# Altium PCB Main_Circuit.PcbDoc
Units mil, origin at the board's own origin, x right, y up, seen from the top; angles counter-clockwise.
Board outline 3000 x 5880 mil, 2 copper layers (Top Layer, Bottom Layer); 17 components, 32 nets, 97 pads, 2 vias.
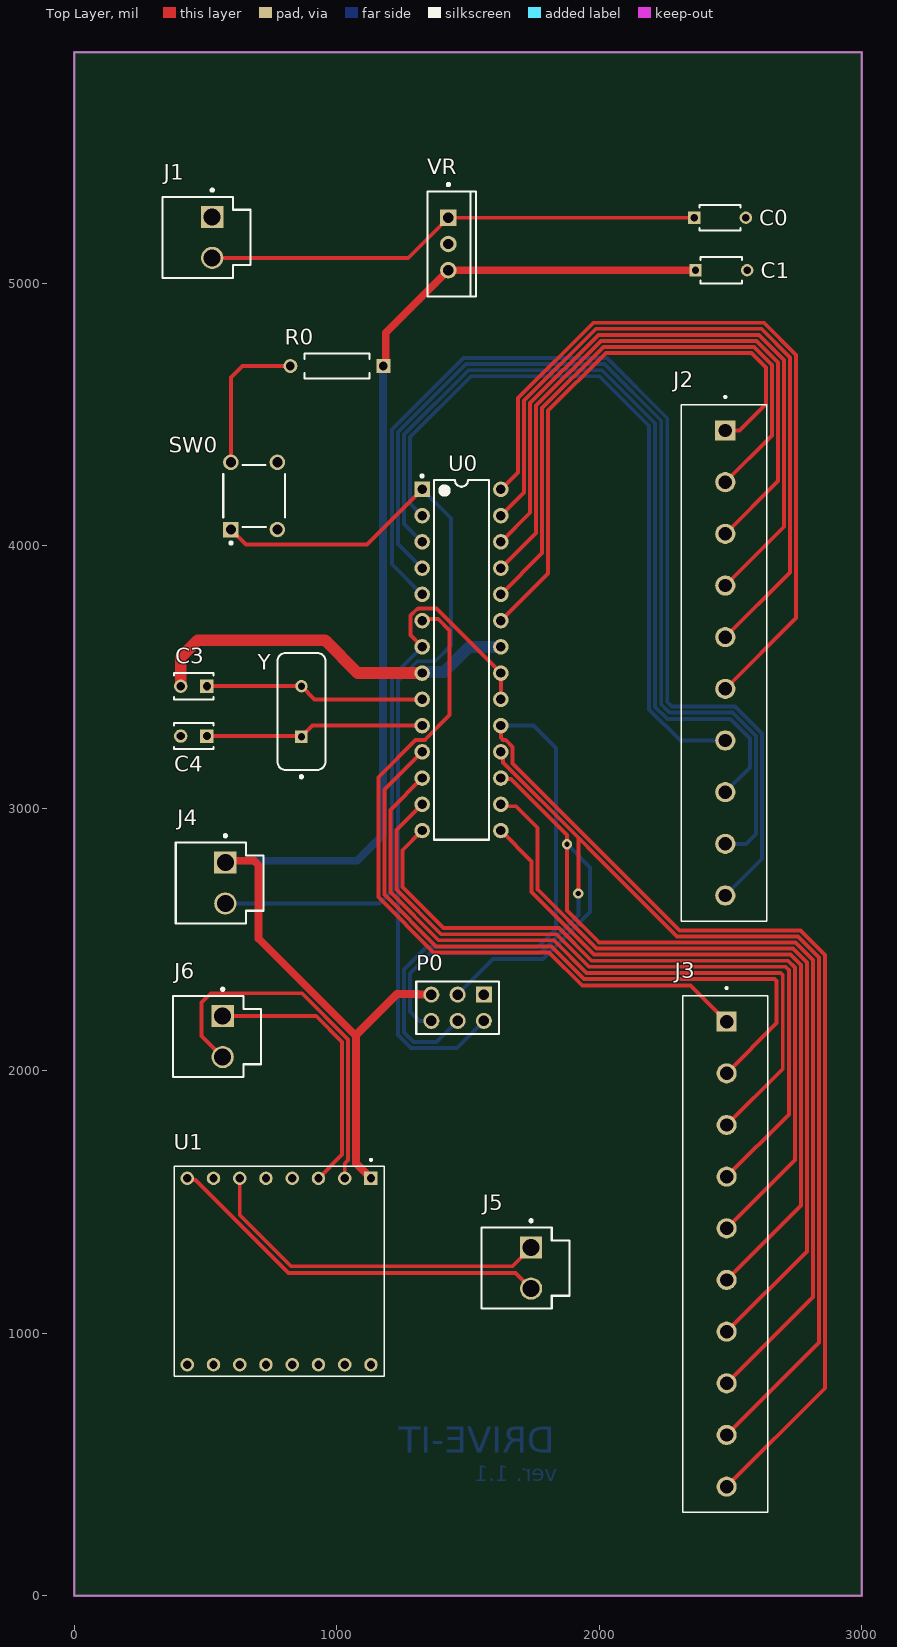
[diagram p0: Top Layer view]
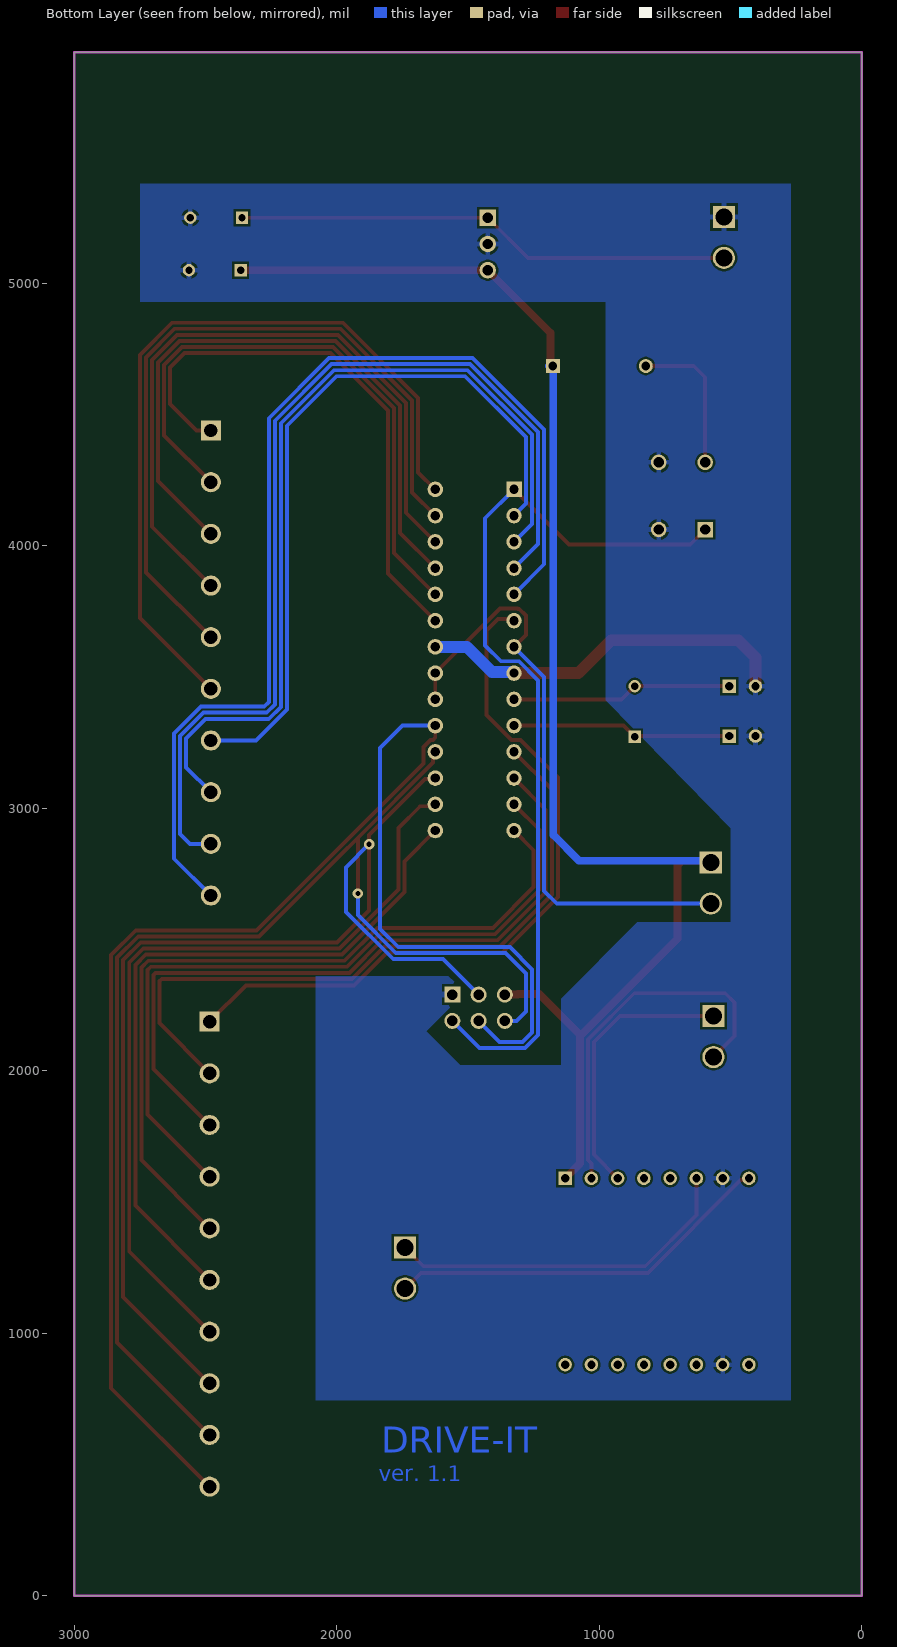
[diagram p1: Bottom Layer view, seen from below]

## Layer stack, top to bottom
Top Solder: solder mask 0.4, Solder Resist, Dk 3.5
Top Layer: signal copper 1.4
Dielectric 1: dielectric 12.6, FR-4, Dk 4.8
Bottom Layer: signal copper 1.4
Bottom Solder: solder mask 0.4, Solder Resist, Dk 3.5

## Board outline
0,0 3000,0 3000,5880 0,5880

## Design rules (kind name [scope] priority, off if disabled: settings)
BoardOutlineClearance [All] p1: gap=7.87 ignorepadtopadclearanceinfootprint=FALSE except(15.75: Arc-SplitBarrior Arc-SplitContinuation Track-SplitBarrior Track-SplitContinuation SMDPad-SplitBarrior SMDPad-SplitContinuation THPad-SplitBarrior THPad-SplitContinuation Via-SplitBarrior Via-SplitContinuation Fill-SplitBarrior Fill-SplitContinuation Poly-SplitBarrior Poly-SplitContinuation Region-SplitBarrior Region-SplitContinuation Text-SplitBarrior Text-SplitContinuation)
Clearance "Clearance Bottom Layer" [OnLayer('Bottom Layer')] p1: gap=8 ignorepadtopadclearanceinfootprint=TRUE except(10: Arc-Text Track-Text SMDPad-Text THPad-Text Via-Text Fill-Text Poly-Text Region-Text Text-Text)
Clearance "Clearance Top Layer" [OnLayer('Top Layer')] p2: gap=8 ignorepadtopadclearanceinfootprint=TRUE except(10: Arc-Text Track-Text SMDPad-Text THPad-Text Via-Text Fill-Text Poly-Text Region-Text Text-Text)
Clearance [All] p3: gap=7.87 ignorepadtopadclearanceinfootprint=FALSE except(3.5: Arc-Arc Arc-Track Arc-SMDPad Track-Track Track-SMDPad SMDPad-SMDPad; 5: Arc-Via Track-Via SMDPad-Via THPad-Via Via-Via; 10: Arc-Text Track-Text SMDPad-Text THPad-Text Via-Text Fill-Text Poly-Text Region-Text Text-Text)
HoleSize [All] p1: absolutevalues=TRUE maxlimit=248.03 minlimit=7.87 maxpercent=80.000 minpercent=20.000
MinimumAnnularRing [All] p1: minimumring=3
MinimumSolderMaskSliver [All] p1: minsoldermaskwidth=3.94
PolygonConnect PolygonConnect_1 [All] p1: thpad.connectstyle=Relief thpad.reliefconductorwidth=20 thpad.reliefentries=4 thpad.polygonreliefangle="90 Angle" thpad.airgapwidth=10 smdpad.connectstyle=Relief smdpad.reliefconductorwidth=20 smdpad.reliefentries=4 smdpad.polygonreliefangle="90 Angle" smdpad.airgapwidth=10 via.connectstyle=Direct via.reliefconductorwidth=20 via.reliefentries=4 via.polygonreliefangle="90 Angle" via.airgapwidth=10
RoutingCorners [All] p1: cornerstyle=Round minsetback=100 maxsetback=100
RoutingVias [All] p1: holewidth=19.68 width=39.37 viastyle="Through Hole" minholewidth=7.87 minwidth=17.72 maxholewidth=39.37 maxwidth=78.74
SilkToSilkClearance [All] p1: silktosilkclearance=3.94
SilkToSolderMaskClearance [IsPad] p1: minsilkscreentomaskgap=3.94 clearancetoexposedcopper=TRUE
SolderMaskExpansion [All] p1: expansion=4 istentingtop=FALSE
Width [All] p1: maxlimit=100 minlimit=3.5 preferedwidth=15
25 further rules are at their usual default settings.

## Classes and differential pairs
component class Main_Circuit: C0 C1 C3 C4 J1 J2 J3 J4 P0 R0 SW0 U0 U1 VR Y

## Components (designator, comment, footprint, x,y, rotation, side; value= is the part's Value field where it differs from the comment)
C0 "0.22uF" FP-RCE1K1-2_5-MFG 2460,5250 r0 top
C1 "0.1uF" FP-K15H5-MFG 2465,5050 r0 top
C3 "22pF" KEMT-C315-THT-2 455,3465 r180 top
C4 "22pF" KEMT-C315-THT-2 455,3275 r180 top
J1 "JST-VH" JST-B2P-VH(LF)(SN)_V 470,5175 r270 top
J2 "1935242" PHOENIX_1935242 2312.68,4537.68 r270 top
J3 "1935242" PHOENIX_1935242 2317.68,2285.28 r270 top
J4 "JST-VH" JST-B2P-VH(LF)(SN)_V 520,2715 r270 top
J5 "JST-VH" JST-B2P-VH(LF)(SN)_V 1684.88,1247.95 r270 top
J6 "JST-VH" JST-B2P-VH(LF)(SN)_V 510,2130 r270 top
P0 "TSW-103-08-T-D" SMTC-TSW-103-08-X-D 1560,2290 r180 top
R0 "10k" RESA60-630X240 1000,4685 r180 top
SW0 "1825910-6" TECO-1825910-6_V 685,4190 r90 top
U0 "ATmega328PU" ATML-28P3 1475,3565 r0 top
U1 "DFPlayerMini" MODULE_DFR0299 780,1235 r270 top
VR "LM7805" FAIR-TO-220-3 1425,5150 r0 top
Y "16MHz" FOX-FOXSLF160-20 865,3368.94 r90 top

## Footprints (in the part's own frame and the unit in brackets; to place one, negate y for a bottom-side part, rotate by r counter-clockwise, add the part's x,y. Pads: shape width x height; smd on the part's side, far side on the other; paste and mask are expansions set on the pad)
ATML-28P3 [mm] "DIP, 28-Leads, Body 34.8x7.2mm, Pitch 2.54mm"
  rect 1.5x1.5 hole 0.9: 1(-3.81,16.51)
  round 1.5 hole 0.9: 2(-3.81,13.97) 3(-3.81,11.43) 4(-3.81,8.89) 5(-3.81,6.35) 6(-3.81,3.81) 7(-3.81,1.27) 8(-3.81,-1.27) 9(-3.81,-3.81) 10(-3.81,-6.35) 11(-3.81,-8.89) 12(-3.81,-11.43) 13(-3.81,-13.97) 14(-3.81,-16.51) 15(3.81,-16.51) 16(3.81,-13.97) 17(3.81,-11.43) 18(3.81,-8.89) 19(3.81,-6.35) 20(3.81,-3.81) 21(3.81,-1.27) 22(3.81,1.27) 23(3.81,3.81) 24(3.81,6.35) 25(3.81,8.89) 26(3.81,11.43) 27(3.81,13.97) 28(3.81,16.51)
  silkscreen extent -3.93,-17.4 2.65,17.93, body extent -3.95,-17.4 3.95,17.4, height 4.58
FAIR-TO-220-3 [mm] "FM, 3-Leads, Body 10.2x4.7mm, Pitch 2.54mm"
  rect 1.6x1.6 hole 1: 1(0,2.54)
  round 1.6 hole 1: 2(0,0) 3(0,-2.54)
  silkscreen extent -2.04,-5.1 2.66,5.87, body extent -2.04,-5.1 2.66,5.1, height 18.95
FOX-FOXSLF160-20 [mm] "THD, 2-Leads, Body 11.35x4.65mm"
  rect 1.2x1.2 hole 0.7: 1(-2.44,0)
  round 1.2 hole 0.7: 2(2.44,0)
  silkscreen extent -6.45,-2.33 5.68,2.33, body extent -5.67,-2.32 5.68,2.33, height 3.6
FP-K15H5-MFG [mm]
  rect 1.2x1.2 hole 0.7 paste-2539.97 mask+0: 1(-2.5,0)
  round 1.2 hole 0.7 paste-2539.97 mask+0: 2(2.5,0)
  silkscreen extent -2,-1.3 2,1.3, body extent -3.2,-1.4 3.2,1.4, height 0.25
FP-RCE1K1-2_5-MFG [mm]
  rect 1.2x1.2 hole 0.7 paste-2539.97 mask+0: 1(-2.5,0)
  round 1.2 hole 0.7 paste-2539.97 mask+0: 2(2.5,0)
  silkscreen extent -2,-1.25 2,1.25, body extent -3.2,-1.35 3.2,1.35, height 0.25
JST-B2P-VH(LF)(SN)_V [mm] "THD, 2-Leads, Body 8.5x7.86mm, Pitch 3.96mm"
  rect 2.15x2.15 hole 1.65: 1(-1.98,1.4)
  round 2.15 hole 1.65: 2(1.98,1.4)
  silkscreen extent -4.7,-3.4 3.93,5.1, body extent -3.93,-3.2 3.93,5.3, height 10.9
KEMT-C315-THT-2 [mm] "THD, 2-Leads, Body 3.81x2.54mm"
  rect 1.3x1.3 hole 0.8: 1(-1.27,0)
  round 1.3 hole 0.8: 2(1.27,0)
  silkscreen extent -1.91,-1.27 1.91,1.27, body extent -1.91,-1.27 1.91,1.27, height 4.66
MODULE_DFR0299 [mil]
  rect 51.5x51.5 hole 31.5: 1(-355,350)
  round 51.5 hole 31.5: 2(-355,250) 3(-355,150) 4(-355,50) 5(-355,-50) 6(-355,-150) 7(-355,-250) 8(-355,-350) 9(355,-350) 10(355,-250) 11(355,-150) 12(355,-50) 13(355,50) 14(355,150) 15(355,250) 16(355,350)
  silkscreen extent -429,-400 400,400
PHOENIX_1935242 [mm]
  rect 1.95x1.95 / inner round 1.95 / far side rect 1.95x1.95 hole 1.3: 1(2.5,4.25)
  round 1.95 hole 1.3: 2(7.5,4.25) 3(12.5,4.25) 4(17.5,4.25) 5(22.5,4.25) 6(27.5,4.25) 7(32.5,4.25) 8(37.5,4.25) 9(42.5,4.25) 10(47.5,4.25)
  silkscreen extent -0.85,0 50,8.25
RESA60-630X240 [mm] "Axial Resistor, 2-Leads, Dia 2.4mm, Body Length 6.3mm"
  rect 1.35x1.35 hole 0.85: 1(-4.5,0)
  round 1.35 hole 0.85: 2(4.5,0)
  silkscreen extent -3.15,-1.2 3.15,1.2, body extent -4.77,-1.19 4.77,1.2, height 2.4
SMTC-TSW-103-08-X-D [mm] ".025 SQ Post Terminal Strip Assembly, 2x3 Pins, Vertical, 2.54mm Pitch, Male"
  rect 1.55x1.55 hole 1.02: 1(0,0)
  round 1.55 hole 1.02: 2(0,2.54) 3(2.54,0) 4(2.54,2.54) 5(5.08,0) 6(5.08,2.54)
  silkscreen extent -1.46,-1.27 6.54,3.81, body extent -1.27,-1.27 6.35,3.81, height 8.38
TECO-1825910-6_V [mm] "Switch, 4-Leads, Body 5.99x5.99mm"
  rect 1.5x1.5 hole 0.99: 1(-3.25,2.25)
  round 1.5 hole 0.99: 2(3.25,2.25) 3(-3.25,-2.25) 4(3.25,-2.25)
  silkscreen extent -4.67,-3 3,3, body extent -3,-2.99 2.99,3, height 5

## Part data
C0: library part CMP-06035-033138-1, "Cap Ceramic Monolithic 220nF 50V 10% Thru-Hole Bulk", Capacitance=220nF, Case/Package=Radial, Dielectric=X7R, Max Operating Temperature=125°C, Min Operating Temperature=-55°C, Package Quantity=500, Ratings=AEC-Q200, Resistor Type=Ceramic, Tolerance=10%, Voltage Rating=50V, Height=3.5mm, Height - Seated (Max)=0.138inch, Lead Diameter=0.5mm, Lead Pitch=0.197inch, Lead/Base Style="Formed Leads", Length=0.157inch, Mount="Through Hole", Packaging=Bulk, Termination=Radial, Voltage Rating (DC)=50V, Width=0.098inch
C1: library part CMP-02417-000048-1, "CAP CER 0.1UF 50V X7R RADIAL", Capacitance=100nF, Case/Package=Dipped, Dielectric=X7R, Max Operating Temperature=125°C, Min Operating Temperature=-55°C, Package Quantity=5000, Tolerance=10%, Voltage=50V, Construction=RADIAL, Depth=2.5mm, Diameter=500um, Height=4mm, Height - Seated (Max)=0.1inch, Lead Diameter=0.5mm, Lead Length=30mm, Lead Pitch=5mm, Lead/Base Style="Formed Leads", Length=4mm, Mount="Through Hole", Packaging=Bulk, Radiation Hardening=No, RoHS Compliant=Yes, Series=K, Termination=Radial, Thickness=2.6mm, Voltage Rating=50V, Voltage Rating (DC)=50V, Weight=0.005644oz, Width=2.5mm
C3 C4: library part CMP-1664-00008-1, "Capacitor, Ceramic, 22 pF, +/-10 %, 100 V, -55 to 125 degC, 2-Pin THD, RoHS, Bulk", Case\Package=TO-220, Max Input Voltage="40 V", Max Operating Temperature="125 degC", Max Ouput Current="1.5 A", Min Input Voltage="4.2 V", Min Operating Temperature="0 degC", Output Voltage="1.2 V", Package Quantity=50, ComponentLink1Description="Manufacturer URL", ComponentLink1URL=http://www.kemet.com/, ComponentLink2Description=Datasheet, ComponentLink2URL=http://capacitoredge.kemet.com/capedge2/DataSheet/Datasheet-C315C220K1G5TA.pdf?pn=C315C220K1G5TA{BULK}, DatasheetVersion=Aug-16, Height="9.28 mm", Length="10.28 mm", Mount="Through Hole", Output Current="1.5 A", Outputs=1, PackageDescription="2-Pin Through Hole Device, Body 3.81 x 2.54 mm", PackageReference=C315-THT-2, Packaging=Rail/Tube, Pins=3, Radiation Hardening=No, REACH SVHC="No SVHC", RoHSCompliant=true, Weight="0.08113 oz", Width="4.82 mm"
J1 J4 J5 J6: library part CMP-002-00025-2, "Male Header, Pitch 3.96 mm, 1 x 2 Position, Height 10.9 mm, Tail Length 3.7 mm, -25 to 85 degC, RoHS, Bulk", Case/Package=B2P-VH(LF)(SN), Manufacturer=JST, Max Operating Temperature=85°C, Min Operating Temperature=-25°C, Package Description="Male Header, Pitch 3.96 mm, 1 x 2 Position, Height 10.9 mm, Tail Length 3.7 mm", Connector Type=Header, Datasheet URL=http://www.jst-mfg.com/product/pdf/eng/eVH.pdf, Datasheet Version=May-16, Gender=Male, Manufacturer URL=http://www.jst.com/home2.html, Mounting Technology=TH, Package Reference=B2P-VH(LF)(SN), RoHS Compliant=Unknown
J2 J3: "PCB Terminal Screw 5mm 16AWG 400V 17.5A 10 Position COMBICON PT Series", Package=None, Check_prices=https://www.snapeda.com/parts/1935242/Phoenix+Contact/view-part/?ref=eda, MF="Phoenix Contact", MP=1935242, SnapEDA_Link=https://www.snapeda.com/parts/1935242/Phoenix+Contact/view-part/?ref=snap
P0: library part CMP-1024-00335-1, "0.025\" SQ Post Header, Through-hole, Vertical, -55 to 105 degC, 2.54 mm Pitch, 6-Pin, Male, RoHS", Manufacturer=Samtec, Temperature Range="-55 to 105 degC", ComponentLink1Description="Manufacturer URL", ComponentLink1URL=http://www.samtec.com, ComponentLink2Description=Datasheet, ComponentLink2URL=http://www.samtec.com/documents/webfiles/pdf/TSW_TH.PDF, ComponentLink3Description="Package Specification", ComponentLink3URL=http://www.samtec.com/documents/webfiles/cpdf/TSW-XXX-XX-XXX-X-XX-XXX-MKT.pdf, DatasheetVersion=F-214, Mounting Technology=Through-hole, Orientation=Vertical, PackageDescription=".025[0.64] SQ. Post Terminal Strip Assembly", PackageReference=TSW-103-08-X-D, PackageVersion="DM, 8/1988", PartNumber=TSW-103-08-T-D, Pitch="2.54 mm", RoHS=True
R0: library part CMP-009-00047-4, "Axial Resistor, 10 KOhm, +/- 1%, 0.25 W, -55 to 155 degC, 2-Pin THD, RoHS, Bulk", Case/Package=Axial, Manufacturer=Yageo, Max Operating Temperature=155°C, Min Operating Temperature=-55°C, Package Description="2-Pin Axial Lead, Dia 2.4 mm, Body Length 6.3 mm", Package Quantity=200, Package Reference=MFR-25, Power=250mW, Tolerance=1%, Voltage Rating=250V, Datasheet URL=http://www.yageo.com/documents/recent/Yageo%20LR_MFR_2013.pdf, Datasheet Version=Apr-13, Manufacturer URL=http://www.yageo.com/, Mounting Technology=TH, Packaging=Bulk, RoHS Compliant=True
SW0: library part CMP-1684-00021-1, "Tact Switch, SPST-NO, 0.05 A, -35 to 85 degC, 4-Pin THD, RoHS, Bulk", Actuator Color=Black, Contact Rating @ Voltage=0.05A@24VDC, Dielectric Strength=500VAC, Manufacturer="TE Connectivity", Maximum AC Voltage Rating=N/A, Maximum Contact Resistance=100mOhm, Maximum DC Voltage Rating=24V, Minimum Insulation Resistance=100MOhm, Operating Temperature=-35to85C, Package Description="4-Pin Through Hole Device, Body 5.99 x 5.99 mm, Pitch 6.5 mm", Package Reference=THD, Actuator Length=1.4mm, Actuator Material=PolybutyleneTerephthalate, Actuator Style=RoundButton, Base Material=N/A, Body Orientation=Straight, Bushing Type=Unthreaded, Contact Material=CopperAlloy, Contact Plating=Silver, Datasheet URL=http://www.te.com/commerce/DocumentDelivery/DDEController?Action=showdoc&DocId=Customer+Drawing%7F1825910%7FC9%7Fpdf%7FEnglish%7FENG_CD_1825910_C9.pdf%7F1825910-6, Datasheet Version="Rev. C9", Dimension=5.99x5mm, Electrical Life=100000Cycles, Family=1825910, Function=MomentaryContact, Housing Material=N/A, Illumination=N/R, Manufacturer URL=http://www.te.com, Mechanical Life=100000Cycles, Mounting=ThroughHole, Packaging=N/A, Part No=1825910-6, Pole Throw Configuration=SPST, Product Weight=N/A, RoHS=Yes, Seal Description=N/A, Seal Location=N/A, Switch Configuration=OFF(ON), Terminal Type=PCPins, Thread Size=N/R
U0: library part CMP-020-00004-3, "8-Bit Microcontroller with 32 KBytes In-System Programmable Flash, 23 I/Os, -40 to 85 degC, 28-Pin PDIP (28P3), RoHS, Tube", Case/Package=DIP, Manufacturer=Atmel, Max Clock Frequency=20MHz, Max Operating Temperature=85°C, Max Supply Voltage=5.5V, Min Operating Temperature=-40°C, Min Supply Voltage=1.8V, Package Description="28-Pin Plastic Dual Inline Package, Body 34.671 x 7.3025 mm, Pitch 2.54 mm", Package Quantity=14, Package Reference=28P3, Package Version="Rev. B, 09/2001", Datasheet URL=http://www.atmel.com/images/Atmel-8271-8-bit-AVR-Microcontroller-ATmega48A-48PA-88A-88PA-168A-168PA-328-328P_datasheet_Complete.pdf, Datasheet Version="Rev. 8271J, 11/2015", Density=32KB, Ethernet Channels=0, I/Os=23, Interface=USART, Manufacturer URL=http://www.atmel.com/, Mounting Technology=TH, Package URL=http://www.atmel.com/images/Atmel-8271-8-bit-AVR-Microcontroller-ATmega48A-48PA-88A-88PA-168A-168PA-328-328P_datasheet_Complete.pdf, Packaging=Rail/Tube, Pins=28, RAM Size=2KB, RoHS Compliant=True
U1: library part DFR0299, "Dfplayer - a Mini Mp3 Player", Package=None, Availability=Unavailable, MP=DFR0299, Price=None
VR: library part CMP-2000-04938-1, "Positive Voltage Regulator, 5 V, 1 A, -40 to 125 degC, 3-Pin TO-220, RoHS, Tube", Manufacturer=FairchildSemiconductor, Maximum Input Voltage=35V, Maximum Output Current=2.2(Typ)A, Maximum Quiescent Current=8mA, Operating Temperature=-40to125degC, Output Voltage=5V, Package=3TO-220AB, Package Description="3-Pin Through Hole Device, Body 10 x 4.5 mm, Pitch 2.54 mm", Package Reference=TO-220, Typical Dropout Voltage @ Current=2@1AV, Accuracy=±4%, Category=LinearRegulator, Datasheet URL=https://datasheet.ciiva.com/26904/lm7805ct-26904988.pdf, Datasheet Version=Aug-12, Line Regulation=100mV, Load Regulation=100mV, Manufacturer URL=https://www.fairchildsemi.com/, Mounting=ThroughHole, Number of Outputs=1, Output Type=Fixed, Package URL=https://www.fairchildsemi.com/package-drawings/TO/TO220B03.pdf, Packaging=Rail/Tube, Polarity=Positive, Rad Hard=No, Type=Linear
Y: library part CMP-1749-00003-1, "Resistance Weld Thru-Hole Crystal, 16 MHz, -20 to 70 degC, 2-Pin THD, RoHS, Bulk", Case\Package=Axial, Max Operating Temperature="155 degC", Min Operating Temperature="-55 degC", Package Quantity=200, Power Rating="250 mW", Resistance="221 kohm", Tolerance=1%, Voltage Rating="250 V", ComponentLink1Description="Manufacturer URL", ComponentLink1URL=http://www.foxonline.com/, ComponentLink2Description=Datasheet, ComponentLink2URL=http://www.foxonline.com/pdfs/hc49slf.pdf, DatasheetVersion=Mar-15, Length="0.248 inch", Mount="Through Hole", PackageDescription="2-Pin Through Hole Device, Body 11.35 x 4.65 mm", PackageReference=FOXSLF160-20, Packaging=Bulk, RoHSCompliant=true

## Via types
v1: diameter 39.37, hole 19.68, Top Layer to Bottom Layer, 2 vias

## Nets (pads, with @x,y where several pads share a name; then routed paths per layer and width w, separated by ;. In a path a pad name is that pad's centre, name@x,y a point inside that pad or via, vN(x,y) a via of type N, cw(c..) or ccw(c..) an arc to the next point about the centre after c; other vN are vias at no path point)
5V: C1.1 J4.1 P0.5 R0.1 U1.1 VR.3 | length 5706.7
  Top Layer w30: J4.1 582.17,2800 684.43,2800 702,2782.43 702,2503 1073.5,2131.5 1073.5,1646.5 U1.1 ; 1071,2134 1228.99,2291.99 1310.01,2291.99 1312,2290 P0.5 ; R0.1 1186.56,4694.39 1186.56,4811.56 VR.3 C1.1
  Bottom Layer w30: J4.1 582.17,2800 1077,2800 1175.59,2898.59 R0.1@1175.59,4673.43 ; R0.1@1180.59,4673.43 R0.1@1192.17,4685
DFRX: J6.2 U1.2 | length 1420.8
  Top Layer w15: J6.2 485,2132.17 485,2260 520,2295 866.87,2295 1043,2118.87 1043,1659.87 1030,1646.87 U1.2
DFTX: J6.1 U1.3 | length 1052.3
  Top Layer w15: J6.1 921.39,2207.95 1020,2109.34 1020,1680 U1.3
GND: C0.2 C1.2 C3.2 C4.2 J1.1 P0.1 SW0.3 SW0.4 U0.8 U0.22 U1.7 U1.10 VR.2 | length 1451.4
  Top Layer w45: C3.2 405,3575 470,3640 955,3640 1080,3515 U0.8
  Bottom Layer w15: U0.8 U0.8@1329.29,3519.29
  Bottom Layer w45: U0.8@1329.29,3519.29 1330.89,3517.69 1337.63,3517.69 1339.23,3519.29 1409.29,3519.29 1505,3615 U0.22
MISO: J3.9 P0.6 U0.18 | length 4788.3
  Top Layer w15: U0.18 1633.43,3206.57 1633.43,3174.1 1920,2887.53 ; v1(1920,2675) 1920,2887.53 ; J3.9 2837,964.05 2837,2430.63 2756.63,2511 2296.47,2511 1990,2817.47 1990,2817.53 1920,2887.53
  Bottom Layer w15: P0.6 1315,2190 1279.17,2225.83 1279.17,2370.17 1357,2448 1775.47,2448 1920,2592.53 v1(1920,2675)
MOSI: J3.8 P0.3 U0.17 | length 4323.1
  Top Layer w15: U0.17 1629.29,3110.71 1664.29,3110.71 1877,2898 1877,2610.69 1999.69,2488 2747.11,2488 2814,2421.11 2814,1137.9 J3.8
  Bottom Layer w15: P0.3 1595,2425 1785,2425 1965,2605 1965,2775 v1(1877,2863)
NetC0_1: C0.1 J1.2 VR.1 | length 1899.8
  Top Layer w15: J1.2 1272.05,5097.05 VR.1 C0.1
NetJ4_2: J4.2 U0.7 U0.20 U0.21 | length 2327.9
  Top Layer w15: U0.7 1279.97,3660.03 1279.97,3729.97 1279.97,3733.65 1306.35,3760.03 1310.03,3760.03 1311,3761 1379,3761 U0.21 U0.20
  Bottom Layer w15: J4.2 1162.05,2637.05 1210.17,2685.17 1210.17,3500.17 U0.7
NetR0_2: R0.2 SW0.2 | length 577.9
  Top Layer w15: SW0.2 596.42,4641.42 640,4685 R0.2@832.83,4685
PB0: J3.5 U0.14 | length 2969.2
  Top Layer w15: U0.14 1250,2840 1250,2700 1405.6,2544.4 1845.71,2544.4 1971.11,2419 2718.53,2419 2745,2392.53 2745,1659.45 J3.5
PB1: J3.6 U0.15 | length 2740.9
  Top Layer w15: U0.15 1742.37,2797.63 1742.37,2680.27 1980.63,2442 2728.05,2442 2768,2402.05 2768,1485.6 J3.6
PC0: J2.1 U0.23 | length 2155.2
  Top Layer w15: U0.23 1805,3895 1805,4515 2025,4735 2580,4735 2635,4680 2635,4540 2534.25,4439.25 J2.1
PC1: J2.2 U0.24 | length 2296.5
  Top Layer w15: U0.24 1782,3972 1782,4524.53 2015.47,4758 2589.53,4758 2658,4689.53 2658,4420.4 J2.2
PC2: J2.3 U0.25 | length 2469.5
  Top Layer w15: U0.25 1759,4049 1759,4534.05 2005.95,4781 2599.05,4781 2681,4699.05 2681,4246.55 J2.3
PC3: J2.4 U0.26 | length 2642.6
  Top Layer w15: U0.26 1736,4126 1736,4543.58 1996.42,4804 2608.58,4804 2704,4708.58 2704,4072.7 J2.4
PC4: J2.5 U0.27 | length 2815.7
  Top Layer w15: U0.27 1713,4203 1713,4553.11 1986.89,4827 2618.11,4827 2727,4718.11 2727,3898.85 J2.5
PC5: J2.6 U0.28 | length 2988.7
  Top Layer w15: U0.28 1690,4280 1690,4562.63 1977.37,4850 2627.63,4850 2750,4727.63 2750,3725 J2.6
PD2: J2.9 U0.4 | length 3758
  Bottom Layer w15: U0.4 1322.5,3912.5 1322.5,3917.5 1233.17,4006.83 1233.17,4433.22 1491.95,4692 1619.53,4692 2020.47,4692 2236,4476.47 2236,3396 2267,3365 2507.47,3365 2597,3275.47 2597,2902 2559.45,2864.45 J2.9
PD3: J2.10 U0.5 | length 4098.6
  Bottom Layer w15: U0.5 1210.17,3929.83 1210.17,4442.75 1482.42,4715 1610,4715 2030,4715 2259,4486 2259,3405.53 2276.53,3388 2517,3388 2620,3285 2620,2807.6 J2.10
PD4: J3.1 U0.6 | length 2798.1
  Top Layer w15: U0.6 1331.08,3721.08 1386.39,3721.08 1430,3677.47 1430,3354.97 1335.06,3260.03 1300.03,3260.03 1158,3118 1158,2661.89 1368.89,2451 1809,2451 1935,2325 2346.85,2325 J3.1
PD5: J3.2 U0.11 | length 2665.3
  Top Layer w15: U0.11 1181,3071 1181,2671.42 1378.42,2474 1818.53,2474 1942.53,2350 2667.21,2350 2676,2341.21 2676,2181 J3.2
PD6: J3.3 U0.12 | length 2770.1
  Top Layer w15: U0.12 1204,2994 1204,2680.95 1387.95,2497 1828.05,2497 1952.05,2373 2690.21,2373 2699,2364.21 2699,2007.15 J3.3
PD7: J3.4 U0.13 | length 2872.3
  Top Layer w15: U0.13 1227,2917 1227,2690.47 1397.47,2520 1837.58,2520 1961.58,2396 2709,2396 2722,2383 2722,1833.3 J3.4
RST: P0.2 SW0.1 U0.1 | length 3476.9
  Top Layer w15: SW0.1 653.47,4005 1115,4005 U0.1
  Bottom Layer w15: U0.1 1435,4105 1435,3620 1375.03,3560.03 1306.35,3560.03 1233.17,3486.84 1233.17,2136.83 1283,2087 1457,2087 P0.2
RX: J2.7 U0.2 | length 2822.8
  Bottom Layer w15: U0.2 1279.17,4160.83 1279.17,4414.17 1511,4646 2001.42,4646 2190,4457.42 2190,3376.95 2308.8,3258.15 J2.7
SCK: J3.10 P0.4 U0.19 | length 5911.6
  Top Layer w15: U0.19 1625,3268.81 1633.79,3260.03 1643.65,3260.03 1670.03,3233.65 1670.03,3170.03 2306.05,2534 2766.16,2534 2860,2440.16 2860,790.2 J3.10
  Bottom Layer w15: P0.4 1380,2110 1292.53,2110 1256.17,2146.36 1256.17,2386.17 1341,2471 1765.95,2471 1835,2540.05 1835,3230 1750,3315 U0.19
SPK1: J5.1 U1.6 | length 1360.1
  Top Layer w15: U1.6 630,1450 825,1255 1669.09,1255 J5.1
SPK2: J5.2 U1.8 | length 1484
  Top Layer w15: U1.8 436.62,1583.38 461.62,1583.38 815,1230 1680,1230 J5.2
SS: J3.7 U0.16 | length 3086.1
  Top Layer w15: U0.16 1632.34,3007.66 1682.34,3007.66 1765.37,2924.63 1765.37,2689.8 1990.16,2465 2737.58,2465 2791,2411.58 2791,1311.75 J3.7
TX: J2.8 U0.3 | length 3314.3
  Bottom Layer w15: U0.3 1256.17,4083.83 1256.17,4423.69 1501.47,4669 1629.05,4669 2010.95,4669 2213,4466.95 2213,3386.47 2259.47,3340 2499.95,3340 2574,3265.95 2574,3155.3 J2.8
XTAL1: C3.1 U0.9 Y.2 | length 840.7
  Top Layer w15: C3.1 Y.2 915,3415 U0.9
XTAL2: C4.1 U0.10 Y.1 | length 838.3
  Top Layer w15: C4.1 862.87,3275 Y.1 907.13,3315 U0.10
pads on no net: U1.4 U1.5 U1.9 U1.11 U1.12 U1.13 U1.14 U1.15 U1.16

## Polygon pours and split planes (outlines as drawn)
GND on Bottom Layer "GND_L02_P000" (solid, remove dead copper, pour order 0): 2750,4930 2750,5380 270,5380 270,745 2080,745 2080,2360 1575,2360 1510,2300 1530,2280 1660,2150 1530,2020 1145,2020 1145,2275 855,2565 500,2565 500,2923.89 975,3410.57 975,4930

## Keep-outs
Keep-Out Layer:
  the board outline again, w10

## Other copper
Bottom Layer:
  text "DRIVE-IT" at 1830,545 h100
  text "ver. 1.1" at 1840,435 h60